# EAGLE board plaque2 (EAGLE 7.2.0)

Size 100 x 80 mm. Coordinates in mm from the lower left corner, seen from the top.
Outline: 0,0 100,0 100,80 0,80 0,0
Copper layers (1*16): Top 0.035mm / dielectric 1.5mm / Bottom 0.035mm
Design rules "default": minimum track width 10mil, minimum drill 24mil, track to track 8mil, track to pad 8mil, pad to pad 8mil, via to via 8mil, smd to smd 8mil, copper to edge 40mil, drill to drill 8mil, minimum pad ring 10mil, minimum via ring 8mil, stop-mask expansion 4mil, vias tented up to drill 0mil, thermal gap 10mil

## Footprints (pad centres in the part's own frame; a part is rotated, then mirrored left to right if it is on the bottom)
7SEG-13 = drill 0.813 long: 1 -5.08,-7.62; 2 -2.54,-7.62; 3 0,-7.62; 4 2.54,-7.62; 5 5.08,-7.62; 6 5.08,7.62; 7 2.54,7.62; 8 0,7.62; 9 -2.54,7.62; 10 -5.08,7.62
DIL16 = drill 0.813 long: 1 -8.89,-3.81; 2 -6.35,-3.81; 3 -3.81,-3.81; 4 -1.27,-3.81; 5 1.27,-3.81; 6 3.81,-3.81; 7 6.35,-3.81; 8 8.89,-3.81; 9 8.89,3.81; 10 6.35,3.81; 11 3.81,3.81; 12 1.27,3.81; 13 -1.27,3.81; 14 -3.81,3.81; 15 -6.35,3.81; 16 -8.89,3.81
TO92 = drill 0.813 octagon: 1 -1.27,0; 2 0,1.905; 3 1.27,0
1X08 = drill 1.016 long: 1 -8.89,0; 2 -6.35,0; 3 -3.81,0; 4 -1.27,0; 5 1.27,0; 6 3.81,0; 7 6.35,0; 8 8.89,0
1X02 = drill 1.016 long: 1 -1.27,0; 2 1.27,0
LED_1206 = smd 1.6 x 1.803: A -1.422,0; C 1.422,0

## Placement (x,y rotation side)
D1  [7SEG-13]  44.45,38.1 0 top
D2  [7SEG-13]  63.5,38.1 0 top
IC1  74LS48N  [DIL16]  33.02,69.85 0 top
IC2  74LS48N  [DIL16]  67.31,69.85 0 top
IC3  LM35CZ  [TO92]  92.71,5.08 0 top
JP1  [1X08]  8.89,19.05 270 top
JP2  [1X08]  93.98,31.75 90 top
JP3  [1X08]  92.71,57.15 90 top
JP4  [1X02]  21.59,5.08 0 top
LED1  [LED_1206]  30.48,30.48 0 top

## Library data of the parts
D1 D2 = special
IC1 IC2 = 74xx-eu
IC3 = lm35
JP1-JP4 = pinhead
LED1 = eagle-ltspice; SPICEMODEL: NONE; SPICEPREFIX: D; SPICETYPE: diode

## Nets
GND: IC1.8 IC2.8
N$1: D1.7 IC1.13
N$2: D1.6 IC1.12
N$3: D1.4 IC1.11
N$4: D1.2 IC1.10
N$5: D1.1 IC1.9
N$6: D1.9 IC1.15
N$7: D1.10 IC1.14
N$8: D2.7 IC2.13
N$9: D2.6 IC2.12
N$10: D2.4 IC2.11
N$11: D2.2 IC2.10
N$12: D2.1 IC2.9
N$13: D2.9 IC2.15
N$14: D2.10 IC2.14
N$15: D1.3 D1.8 D2.3 D2.8 IC1.5 IC3.3 LED1.C
N$16: IC1.3 IC1.4
N$17: IC2.3 IC2.4
N$18: IC2.7
N$19: IC2.1
N$20: IC1.7 JP1.1
N$21: IC1.1 JP1.2
N$22: IC1.6 JP1.3 JP1.4
N$23: IC2.2
N$24: IC2.6
N$25: LED1.A
N$26: IC3.2 JP1.5 JP1.6
N$27: IC3.1 JP4.1
VCC: IC1.16 IC2.16

## Tracks (layer width: path | path; a pad name or v marks a point on that pad's centre or on a via)
GND  (1 unrouted)
N$1  (1 unrouted)
N$2  (1 unrouted)
N$3  (1 unrouted)
N$4  (1 unrouted)
N$5  (1 unrouted)
N$6  (1 unrouted)
N$7  (1 unrouted)
N$8  (1 unrouted)
N$9  (1 unrouted)
N$10  (1 unrouted)
N$11  (1 unrouted)
N$12  (1 unrouted)
N$13  (1 unrouted)
N$14  (1 unrouted)
N$15  (6 unrouted)
N$16  (1 unrouted)
N$17  (1 unrouted)
N$20  (1 unrouted)
N$21  (1 unrouted)
N$22  (2 unrouted)
N$26  (2 unrouted)
N$27  (1 unrouted)
VCC  (1 unrouted)